# Altium PCB ICSP_breakout.PcbDoc
Units mm, origin at the board's own origin, x right, y up, seen from the top; angles counter-clockwise.
Board outline 44.45 x 40.89 mm, 2 copper layers (Top Layer, Bottom Layer); 8 components, 16 nets, 60 pads, 0 vias.
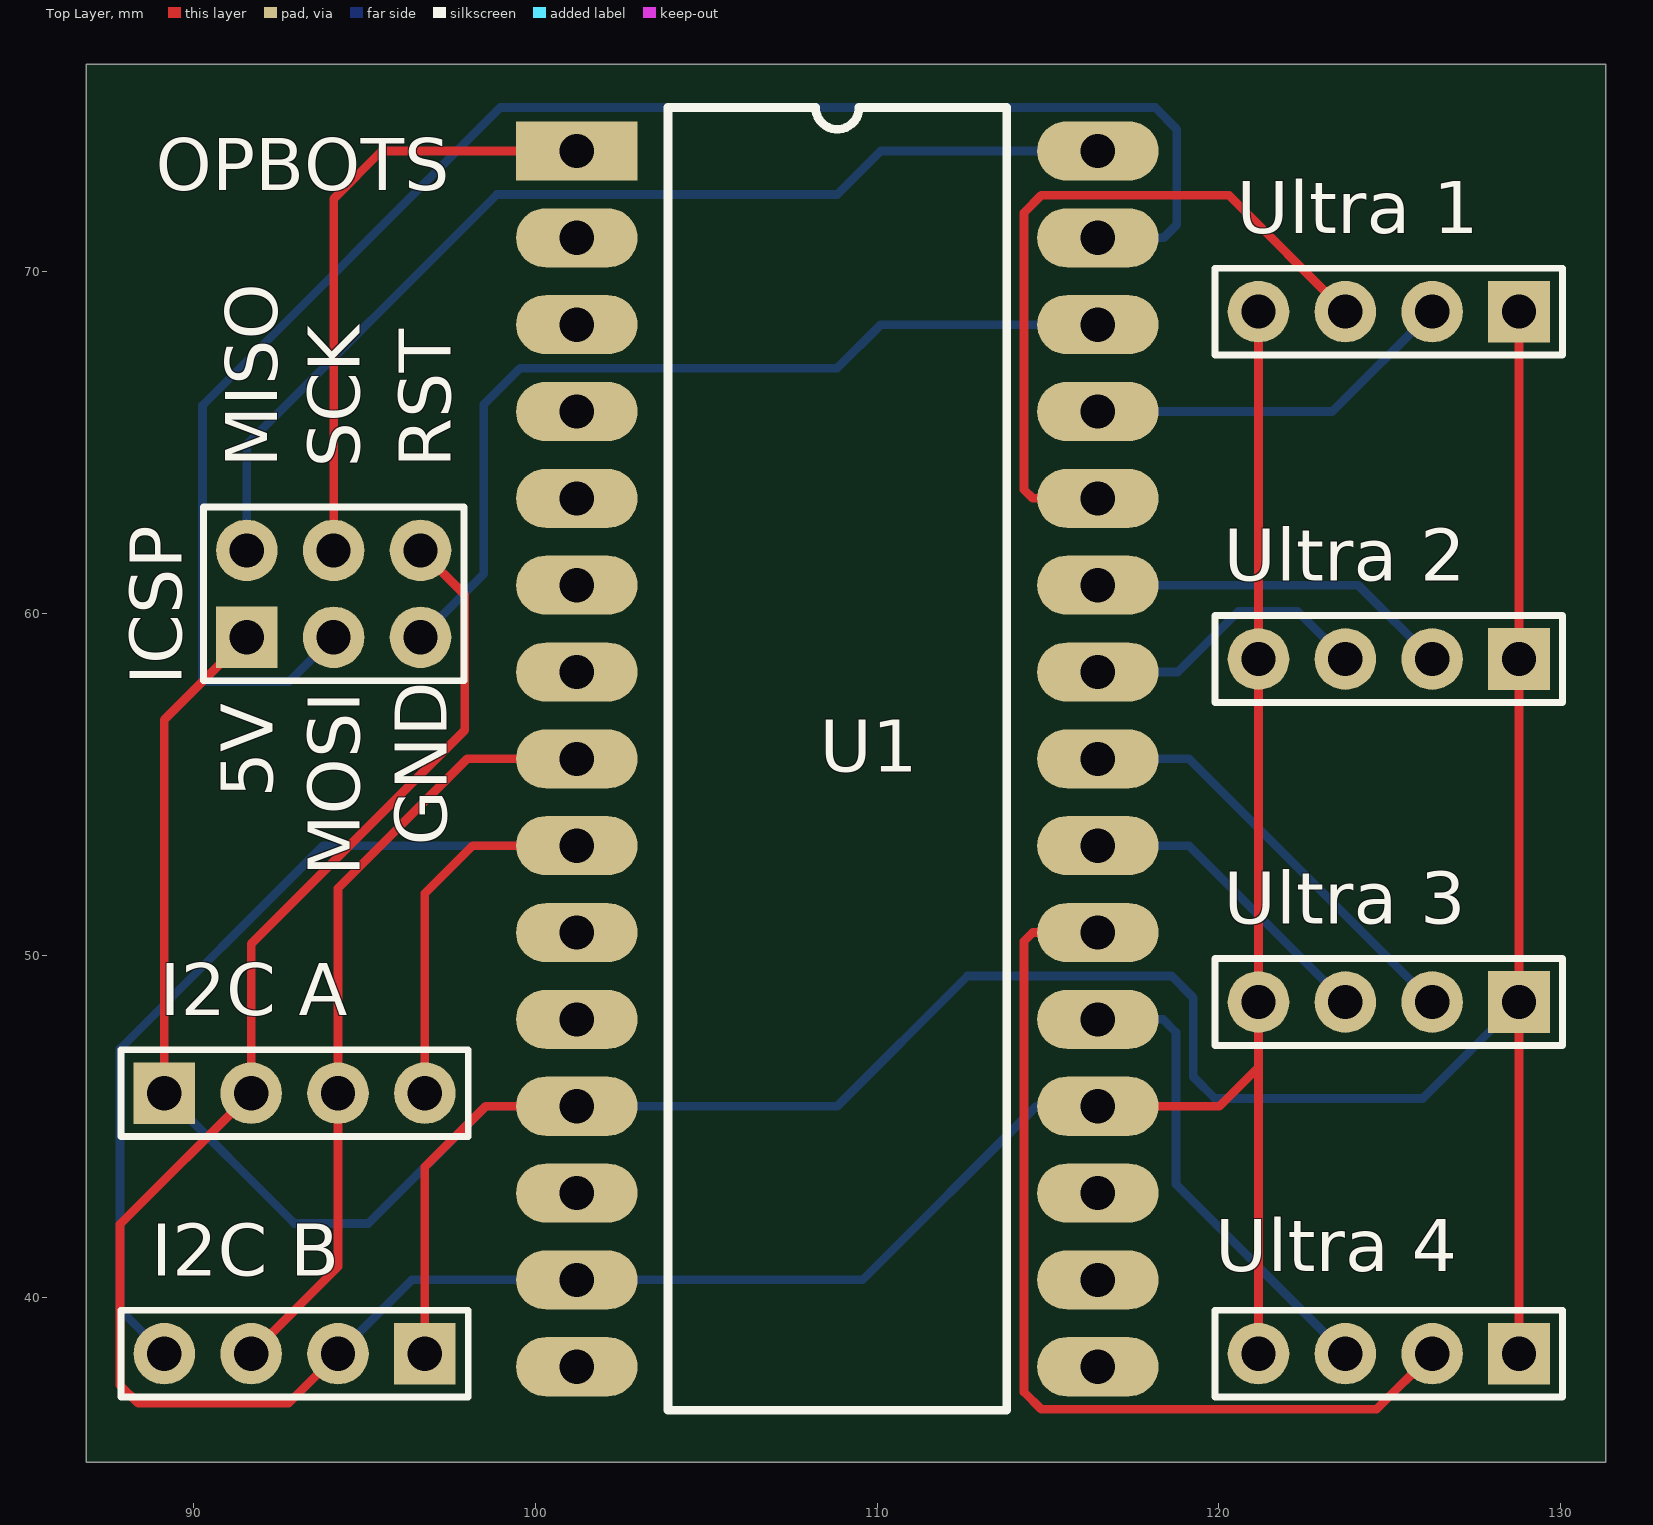
[diagram p0: Top Layer view]
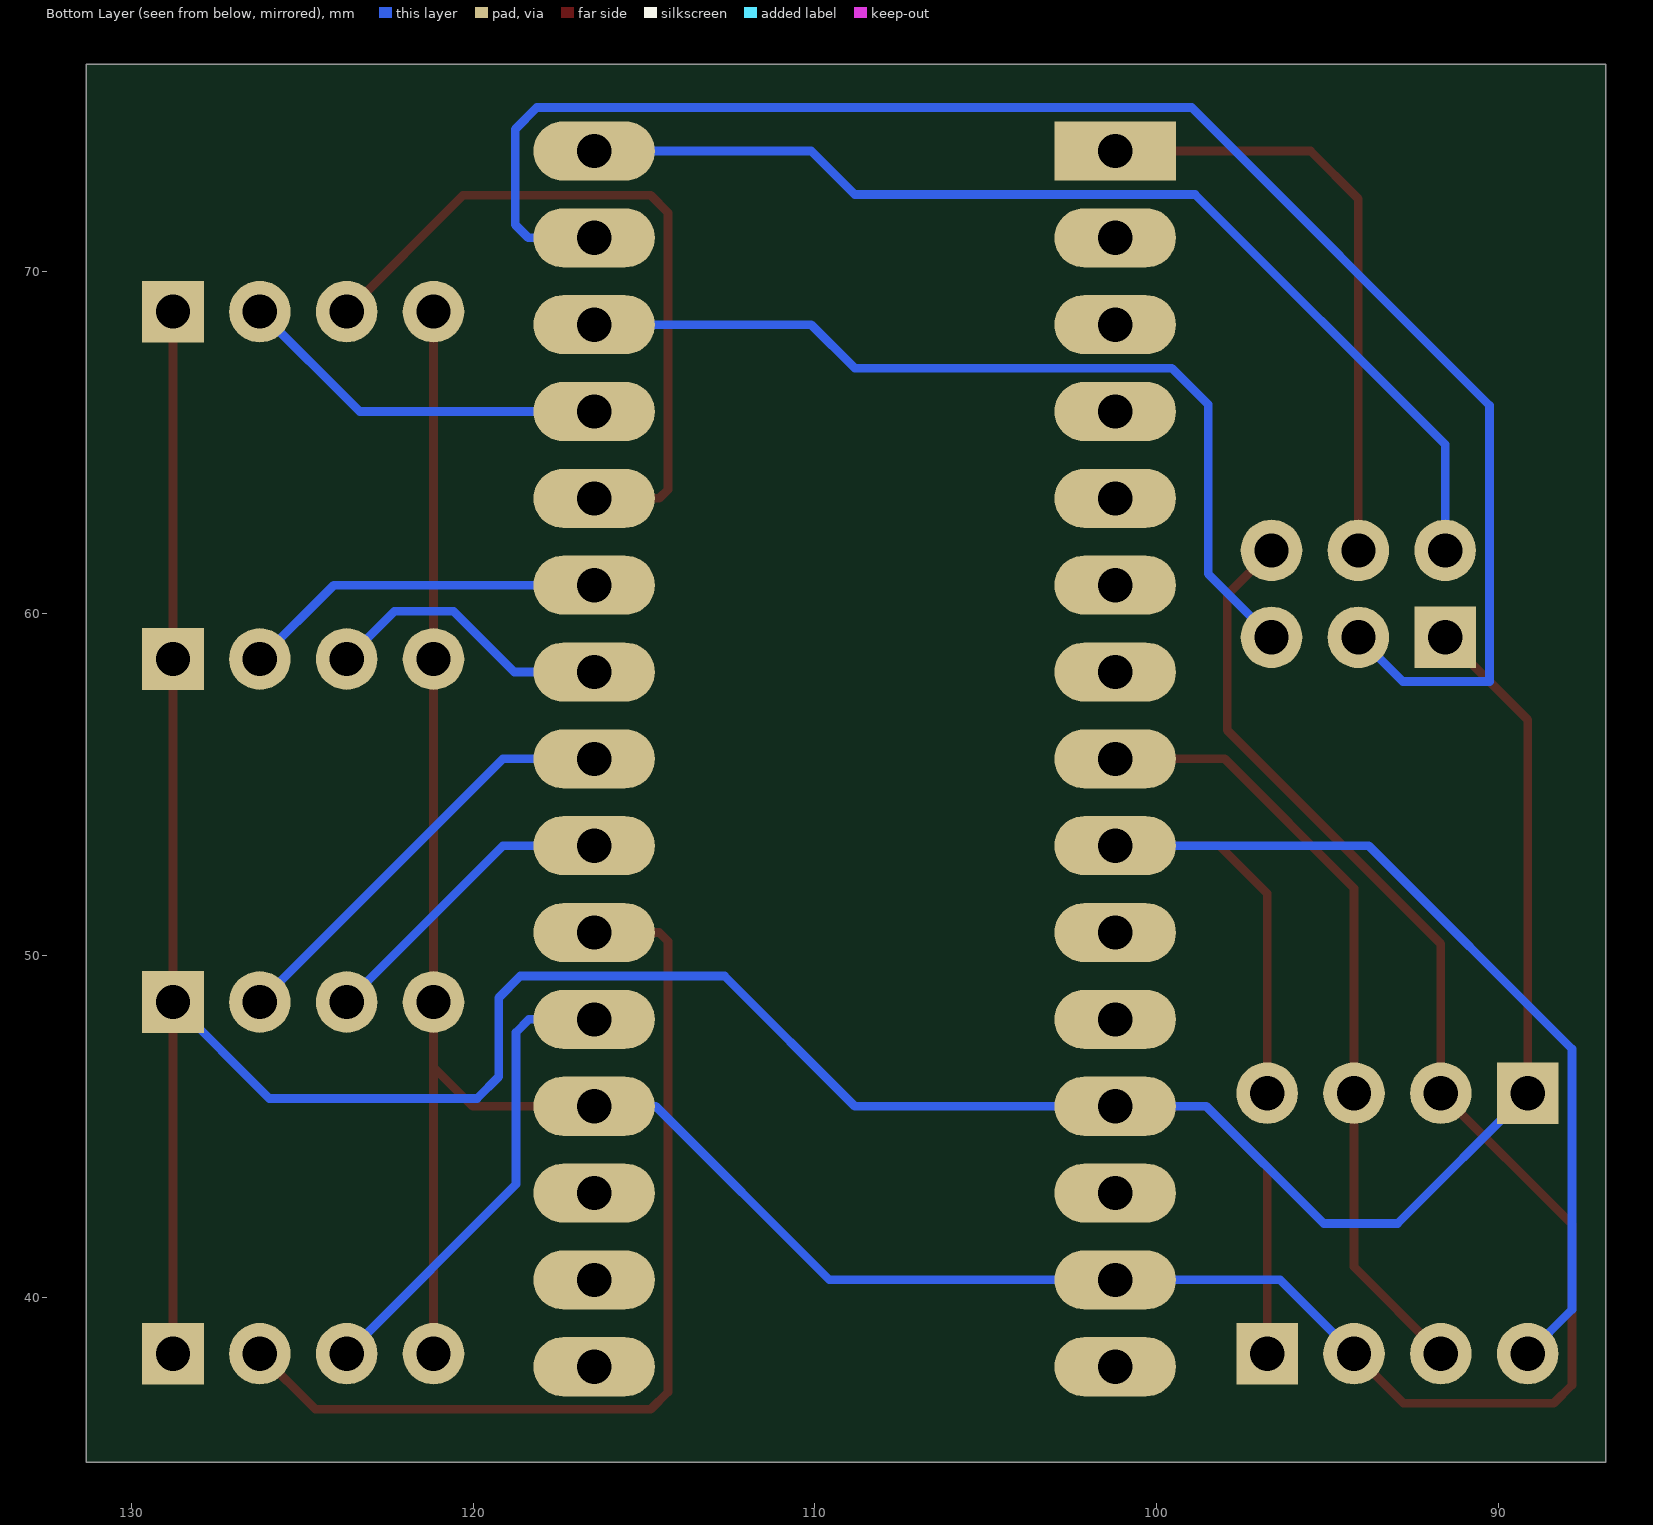
[diagram p1: Bottom Layer view, seen from below]

## Layer stack, top to bottom
Top Solder: solder mask 0.0102, Solder Resist, Dk 3.5
Top Layer: signal copper 0.0356
Dielectric 1: dielectric 0.32, FR-4, Dk 4.8
Bottom Layer: signal copper 0.0356
Bottom Solder: solder mask 0.0102, Solder Resist, Dk 3.5

## Board outline
86.868,35.179 131.318,35.179 131.318,76.073 86.868,76.073

## Design rules (kind name [scope] priority, off if disabled: settings)
Clearance [All] p1: gap=0.254
PolygonConnect [All] p1: connectstyle=Relief reliefconductorwidth=0.254 reliefentries=4 polygonreliefangle="90 Angle" airgapwidth=0.254
RoutingVias [All] p1: holewidth=0.711 width=1.27 viastyle="Through Hole" minholewidth=0.711 minwidth=1.27 maxholewidth=0.711 maxwidth=1.27
SolderMaskExpansion [All] p1: expansion=0.102
UnpouredPolygon [All] p1: allowunpoured=FALSE
Width [All] p1: maxlimit=0.254 minlimit=0.254 preferedwidth=0.254
29 further rules are at their usual default settings.

## Components (designator, comment, footprint, x,y, rotation, side; value= is the part's Value field where it differs from the comment)
"I2C A" "C-Hdr1x4" HDR1X4_LGE1.0 89.154,45.974 r0 top
"I2C B" "C-Hdr1x4" HDR1X4_LGE1.0 96.774,38.354 r180 top
ICSP "C-Hdr1x6" HDR2X3_LGE1.0 91.567,59.309 r0 top
U1 "NanoHeader" DIP30W 101.219,73.533 r0 top
"Ultra 1" "C-Hdr1x4" HDR1X4_LGE1.0 128.778,68.834 r180 top
"Ultra 2" "C-Hdr1x4" HDR1X4_LGE1.0 128.778,58.674 r180 top
"Ultra 3" "C-Hdr1x4" HDR1X4_LGE1.0 128.778,48.641 r180 top
"Ultra 4" "C-Hdr1x4" HDR1X4_LGE1.0 128.778,38.354 r180 top

## Footprints (in the part's own frame and the unit in brackets; to place one, negate y for a bottom-side part, rotate by r counter-clockwise, add the part's x,y. Pads: shape width x height; smd on the part's side, far side on the other; paste and mask are expansions set on the pad)
DIP30W [mil]
  rect 140x68 hole 39.37: 1(0,0)
  oval 140x68 hole 39.37: 2(0,-100) 3(0,-200) 4(0,-300) 5(0,-400) 6(0,-500) 7(0,-600) 8(0,-700) 9(0,-800) 10(0,-900) 11(0,-1000) 12(0,-1100) 13(0,-1200) 14(0,-1300) 15(0,-1400) 16(600,-1400) 17(600,-1300) 18(600,-1200) 19(600,-1100) 20(600,-1000) 21(600,-900) 22(600,-800) 23(600,-700) 24(600,-600) 25(600,-500) 26(600,-400) 27(600,-300) 28(600,-200) 29(600,-100) 30(600,0)
  silkscreen extent 105,-1450 495,50
HDR1X4_LGE1.0 [mm] "Connector; Header; 4 Position"
  rect 1.8x1.8 hole 1: 1(0,0)
  round 1.8 hole 1: 2(2.54,0) 3(5.08,0) 4(7.62,0)
  silkscreen extent -1.27,-1.27 8.89,1.27
HDR2X3_LGE1.0 [mm] "Connector; Header; 4x2 Position"
  rect 1.8x1.8 hole 1: 1(0,0)
  round 1.8 hole 1: 2(0,2.54) 3(2.54,0) 4(2.54,2.54) 5(5.08,0) 6(5.08,2.54)
  silkscreen extent -1.27,-1.27 6.35,3.81

## Part data
"I2C A" "I2C B" "Ultra 1" "Ultra 2" "Ultra 3" "Ultra 4": "Header, 4-Pin"
ICSP: "Header, 6-Pin"

## Nets (pads, with @x,y where several pads share a name; then routed paths per layer and width w, separated by ;. In a path a pad name is that pad's centre, name@x,y a point inside that pad or via, vN(x,y) a via of type N, cw(c..) or ccw(c..) an arc to the next point about the centre after c; other vN are vias at no path point)
5V: "I2C A.1" "I2C B.1" "Ultra 1.1" "Ultra 2.1" "Ultra 3.1" "Ultra 4.1" ICSP.1 U1.12 | length 103.7
  Top Layer w0.254: 89.154,45.974 89.154,56.896 ICSP.1 ; 96.774,38.354 96.774,43.815 98.552,45.593 U1.12 ; 128.778,38.354 128.778,48.641 128.778,58.674 128.778,68.834
  Bottom Layer w0.254: 89.154,45.974 92.964,42.164 95.123,42.164 98.552,45.593 U1.12 108.839,45.593 112.649,49.403 118.618,49.403 119.253,48.768 119.253,46.457 119.888,45.822 125.959,45.822 128.778,48.641
GND: "I2C A.2" "I2C B.2" "Ultra 1.4" "Ultra 2.4" "Ultra 3.4" "Ultra 4.4" ICSP.6 U1.14 U1.19 | length 97.2
  Top Layer w0.254: 94.234,38.354 92.786,36.906 88.392,36.906 87.859,37.44 87.859,42.139 91.694,45.974 91.694,50.343 97.942,56.591 97.942,60.554 ICSP.6 ; U1.19 120.015,45.593 121.158,46.736 ; 121.158,38.354 121.158,46.736 ; 121.158,68.834 121.158,58.674 121.158,48.641 121.158,46.736
  Bottom Layer w0.254: 94.234,38.354 96.393,40.513 U1.14 109.576,40.513 114.656,45.593 U1.19
"NetI2C A_3": "I2C A.3" "I2C B.3" U1.8 | length 23.2
  Top Layer w0.254: 91.694,38.354 94.234,40.894 94.234,45.974 94.234,51.968 98.019,55.753 U1.8
"NetI2C A_4": "I2C A.4" "I2C B.4" U1.9 | length 36.1
  Top Layer w0.254: 96.774,45.974 96.774,51.816 98.171,53.213 U1.9
  Bottom Layer w0.254: 89.154,38.354 87.859,39.649 87.859,47.269 93.802,53.213 U1.9
NetICSP_2: ICSP.2 U1.30 | length 31.5
  Bottom Layer w0.254: ICSP.2 91.567,64.948 98.882,72.263 108.839,72.263 110.109,73.533 U1.30
NetICSP_3: ICSP.3 U1.29 | length 50.1
  Bottom Layer w0.254: ICSP.3 92.812,58.014 90.272,58.014 90.272,66.091 98.984,74.803 118.135,74.803 118.77,74.168 118.77,71.374 118.389,70.993 U1.29
NetICSP_4: ICSP.4 U1.1 | length 18
  Top Layer w0.254: ICSP.4 94.107,72.136 95.504,73.533 U1.1
NetICSP_5: ICSP.5 U1.28 | length 26.5
  Bottom Layer w0.254: ICSP.5 98.501,61.163 98.501,66.116 99.568,67.183 108.839,67.183 110.109,68.453 U1.28
NetU1_20: "Ultra 4.3" U1.20 | length 13.9
  Bottom Layer w0.254: U1.20 118.364,48.133 118.745,47.752 118.745,43.307 123.698,38.354
NetU1_21: "Ultra 4.2" U1.21 | length 28.3
  Top Layer w0.254: U1.21 114.554,50.673 114.3,50.419 114.3,37.236 114.808,36.728 124.612,36.728 126.238,38.354
NetU1_22: "Ultra 3.3" U1.22 | length 9.1
  Bottom Layer w0.254: U1.22 119.126,53.213 123.698,48.641
NetU1_23: "Ultra 3.2" U1.23 | length 12.7
  Bottom Layer w0.254: U1.23 119.126,55.753 126.238,48.641
NetU1_24: "Ultra 2.3" U1.24 | length 8.6
  Bottom Layer w0.254: U1.24 118.796,58.293 120.574,60.071 122.301,60.071 123.698,58.674
NetU1_25: "Ultra 2.2" U1.25 | length 10.7
  Bottom Layer w0.254: U1.25 124.079,60.833 126.238,58.674
NetU1_26: "Ultra 1.3" U1.26 | length 21.4
  Top Layer w0.254: U1.26 114.554,63.373 114.3,63.627 114.3,71.73 114.808,72.238 120.294,72.238 123.698,68.834
NetU1_27: "Ultra 1.2" U1.27 | length 11
  Bottom Layer w0.254: U1.27 123.317,65.913 126.238,68.834
pads on no net: U1.2 U1.3 U1.4 U1.5 U1.6 U1.7 U1.10 U1.11 U1.13 U1.15 U1.16 U1.17 U1.18

## Silkscreen, mask and mechanical layers (free items; w line width, h text height)
Top Overlay:
  text "OPBOTS" at 88.9,72.39 h1.52
  text "MISO" at 92.456,64.262 h1.52 r90
  text "SCK" at 94.869,64.262 h1.52 r90
  text "RST" at 97.536,64.262 h1.52 r90
  text "5V" at 92.329,54.61 h1.52 r90
  text "GND" at 97.409,53.213 h1.52 r90
  text "MOSI" at 94.869,52.324 h1.52 r90
Mechanical 1:
  the board outline again, w0.254